# Altium PCB Controller PCB.PcbDoc
Units mil, origin at the board's own origin, x right, y up, seen from the top; angles counter-clockwise.
Board outline 944.88 x 1338.58 mil, 2 copper layers (Top, Bottom); 2 components, 10 nets, 32 pads, 4 vias.
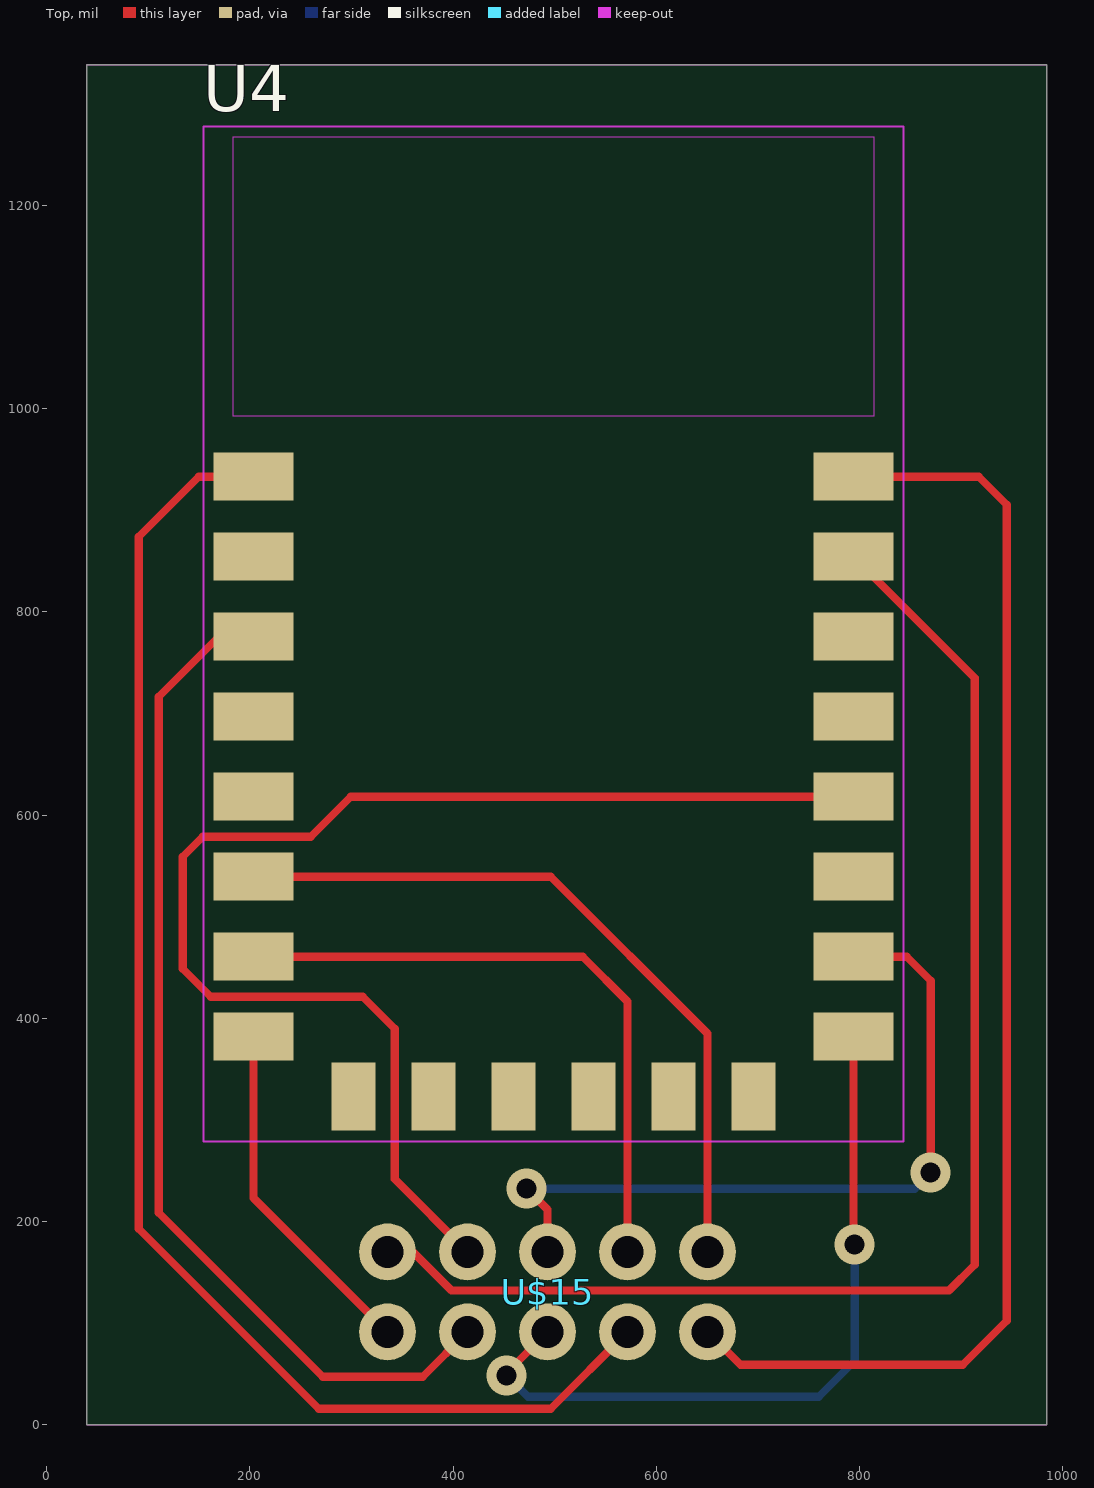
[diagram p0: Top view]
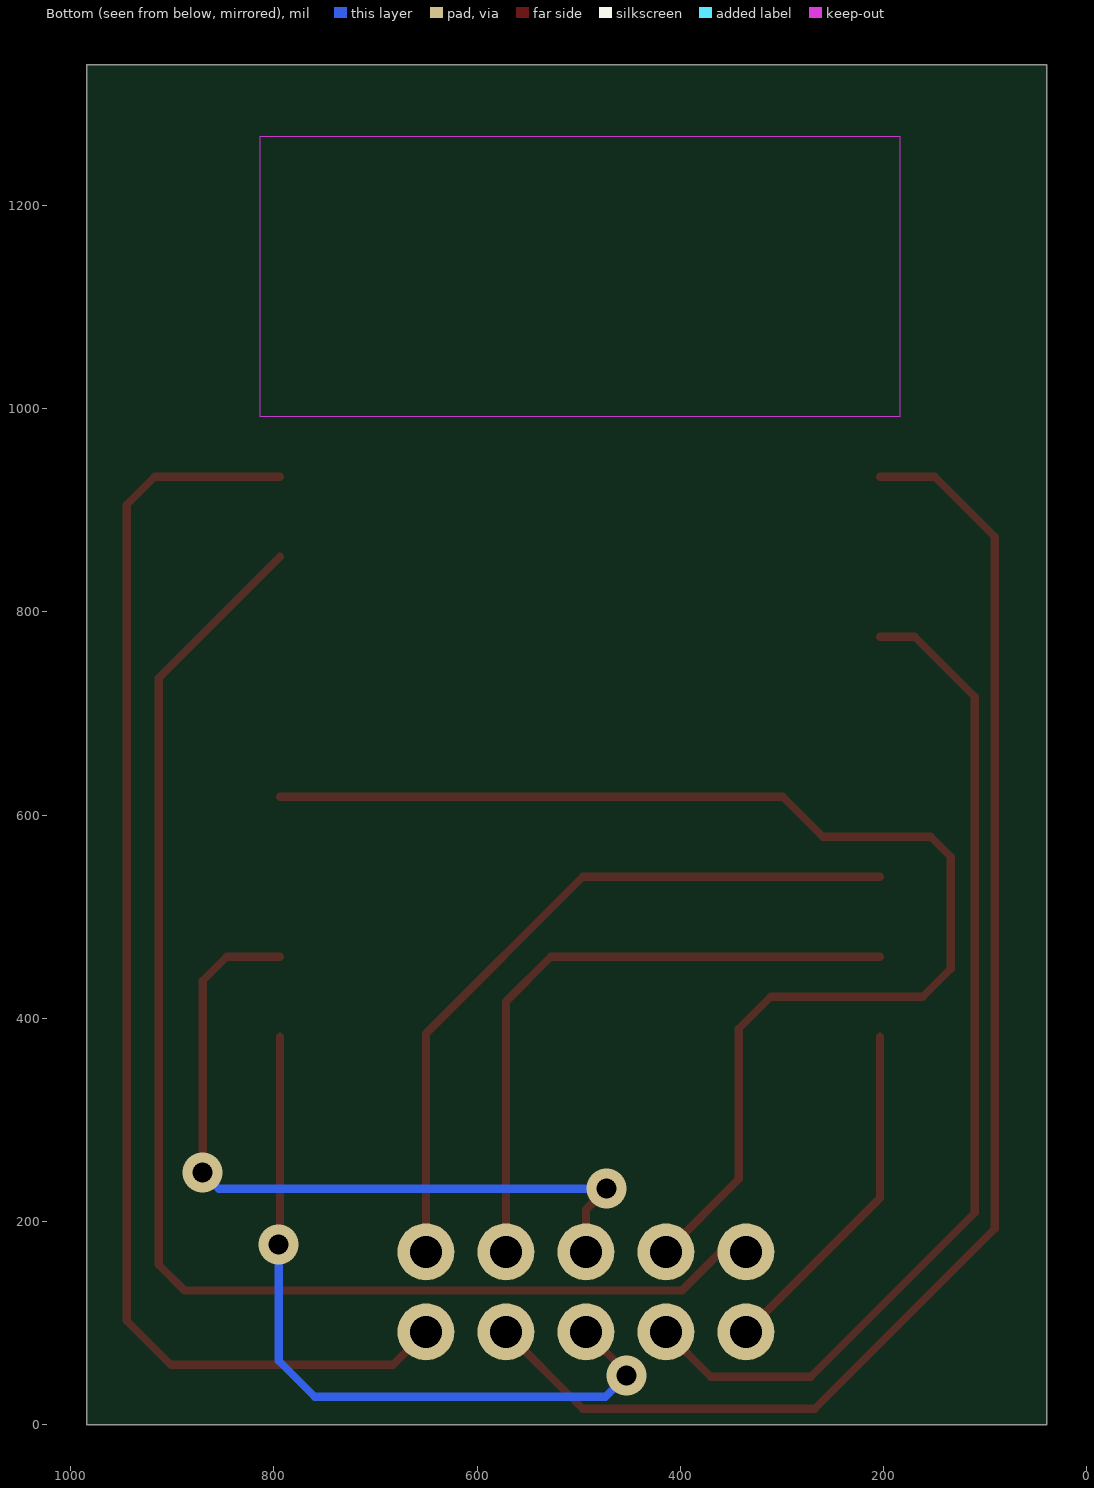
[diagram p1: Bottom view, seen from below]

## Layer stack, top to bottom
Top Solder: solder mask 0.4, Solder Resist, Dk 3.5
Top: signal copper 1.378
Dielectric 1: dielectric 12.6, FR-4, Dk 4.8
Bottom: signal copper 1.378
Bottom Solder: solder mask 0.4, Solder Resist, Dk 3.5

## Board outline
39.37,1338.58 39.37,0 984.25,0 984.25,1338.58

## Design rules (kind name [scope] priority, off if disabled: settings)
BoardOutlineClearance mdCopperDimension [All] p1: gap=10 ignorepadtopadclearanceinfootprint=FALSE except(0: Arc-SplitContinuation Track-SplitContinuation SMDPad-SplitContinuation THPad-SplitContinuation Via-SplitContinuation Fill-SplitContinuation Poly-SplitContinuation Region-SplitContinuation Text-SplitContinuation; 6: Poly-OutlineEdge Poly-CavityEdge Poly-CutoutEdge Poly-SplitBarrior)
Clearance "Clearance (Same Net)" [All] p1: gap=6 ignorepadtopadclearanceinfootprint=FALSE
Clearance [All] p2: gap=6 ignorepadtopadclearanceinfootprint=FALSE
HoleSize [All] p1: absolutevalues=TRUE maxlimit=100000 minlimit=13.78 maxpercent=80.000 minpercent=20.000
HoleToHoleClearance mdDrill [All] p1: gap=6 allowstackedmicrovias=TRUE
MinimumSolderMaskSliver [All] p1 off: minsoldermaskwidth=10
PasteMaskExpansion mlMinCreamFrame [All] p1: expansion=0
PolygonConnect ThermalVias [IsVia] p1: connectstyle=Direct reliefconductorwidth=10 reliefentries=4 polygonreliefangle="90 Angle" airgapwidth=10
PolygonConnect [All] p2: connectstyle=Relief reliefconductorwidth=10 reliefentries=4 polygonreliefangle="90 Angle" airgapwidth=10
RoutingVias [All] p1: holewidth=13.78 width=29.78 viastyle="Through Hole" minholewidth=13.78 minwidth=29.78 maxholewidth=100 maxwidth=100
SolderMaskExpansion mlMinStopFrame [All] p1: expansion=4 istentingtop=FALSE
Width [All] p1: maxlimit=10000 minlimit=6 preferedwidth=6
26 further rules are at their usual default settings.

## Components (designator, comment, footprint, x,y, rotation, side; value= is the part's Value field where it differs from the comment)
U4 "" XCVR_ESP8266-12E/ESP-12E 498.82,657.48 r0 top
U$15 "" 2X5 492.91,130.71 r0 top

## Footprints (in the part's own frame and the unit in brackets; to place one, negate y for a bottom-side part, rotate by r counter-clockwise, add the part's x,y. Pads: shape width x height; smd on the part's side, far side on the other; paste and mask are expansions set on the pad)
2X5 [mil] "2X5"
  round 56 hole 31.5: 1(-157.48,-39.37) 2(-157.48,39.37) 3(-78.74,-39.37) 4(-78.74,39.37) 5(0,-39.37) 6(0,39.37) 7(78.74,-39.37) 8(78.74,39.37) 9(157.48,-39.37) 10(157.48,39.37)
XCVR_ESP8266-12E/ESP-12E [mm] "XCVR_ESP8266-12E/ESP-12E"
  rect 2x1.2 smd: 1(-7.5,7) 2(-7.5,5) 3(-7.5,3) 4(-7.5,1) 5(-7.5,-1) 6(-7.5,-3) 7(-7.5,-5) 8(-7.5,-7) 15(7.5,-7) 16(7.5,-5) 17(7.5,-3) 18(7.5,-1) 19(7.5,1) 20(7.5,3) 21(7.5,5) 22(7.5,7)
  rect 1.1x1.7 smd: 9(-5,-8.5) 10(-3,-8.5) 11(-1,-8.5) 12(1,-8.5) 13(3,-8.5) 14(5,-8.5)
  Top keep-out region: -8.009,8.51 -8.009,15.5 8,15.5 8,8.51
  Top keep-out lines w0.05: -8.75,-9.625 -8.75,15.75 8.75,15.75 8.75,-9.625 -8.75,-9.625
  Bottom keep-out region: -8.009,8.51 -8.009,15.5 8,15.5 8,8.51

## Part data
U4: library part XCVR_ESP8266-12E/ESP-12E, PackageName=XCVR_ESP8266-12E/ESP-12E
U$15: library part 2X5, PackageName=2X5

## Via types
v1: diameter 39.37/39.37 (per signal layer), hole 19.69, Top to Bottom, 4 vias

## Nets (pads, with @x,y where several pads share a name; then routed paths per layer and width w, separated by ;. In a path a pad name is that pad's centre, name@x,y a point inside that pad or via, vN(x,y) a via of type N, cw(c..) or ccw(c..) an arc to the next point about the centre after c; other vN are vias at no path point)
N$2: U4.8 U$15.1 | length 345.2
  Top w8: U4.8 203.54,223.23 U$15.1
N$15: U4.3 U$15.3 | length 1014.7
  Top w8: U4.3 169.29,775.59 110.24,716.54 110.24,208.66 271.65,47.24 370.08,47.24 U$15.3
N$16: U4.15 U$15.5 | length 744.7
  Top w8: v1(452.76,48.51) 452.76,51.18 U$15.5 ; U4.15 794.09,178.35 v1(795.28,177.17)
  Bottom w8: v1(452.76,48.51) 473.71,27.56 759.84,27.56 795.28,62.99 v1(795.28,177.17)
N$17: U4.1 U$15.7 | length 1404.3
  Top w8: U4.1 149.61,933.07 90.55,874.02 90.55,192.91 267.72,15.75 496.06,15.75 U$15.7
N$19: U4.22 U$15.9 | length 1291.1
  Top w8: U$15.9 682.68,59.06 901.57,59.06 944.88,102.36 944.88,905.51 917.32,933.07 U4.22
N$20: U4.21 U$15.2 | length 1350.5
  Top w8: U$15.2 360.43,170.08 398.43,132.08 507.87,132.08 509.65,132.08 887.98,132.08 913.39,157.48 913.39,735.04 U4.21
N$21: U4.18 U$15.4 | length 1277.4
  Top w8: U$15.4 342.52,241.73 342.52,389.76 311.02,421.26 161.42,421.26 133.86,448.82 133.86,559.06 153.54,578.74 259.84,578.74 299.21,618.11 U4.18
N$23: U4.16 U$15.6 | length 749.6
  Top w8: v1(472.44,232.28) 492.91,211.81 U$15.6 ; U4.16 846.46,460.63 870.08,437.01 v1(870.08,248.03)
  Bottom w8: v1(472.44,232.28) 854.33,232.28 v1(870.08,248.03)
N$28: U4.6 U$15.10 | length 725.7
  Top w8: U4.6 496.06,539.37 650.39,385.04 U$15.10
N$29: U4.7 U$15.8 | length 632.8
  Top w8: U4.7 527.56,460.63 571.65,416.54 U$15.8
pads on no net: U4.2 U4.4 U4.5 U4.9 U4.10 U4.11 U4.12 U4.13 U4.14 U4.17 U4.19 U4.20

## Keep-outs
Keep-Out Layer:
  the board outline again, w0

## Silkscreen, mask and mechanical layers (free items; w line width, h text height)
Dimension:
  the board outline again, w0